# EAGLE board LOGO (EAGLE 7.5.0)

No outline drawn. Coordinates in mm, seen from the top.
Copper layers (1*16): Top 0.035mm / dielectric 1.5mm / Bottom 0.035mm
Design rules "default": minimum track width 10mil, minimum drill 24mil, track to track 8mil, track to pad 8mil, pad to pad 8mil, via to via 8mil, smd to smd 8mil, copper to edge 40mil, drill to drill 8mil, minimum pad ring 10mil, minimum via ring 8mil, stop-mask expansion 4mil, vias tented up to drill 0mil, thermal gap 10mil

## Placement (x,y rotation side)
U$1  [DIOSTUDIO_50]  0,0 0 top
U$2  [DIOSTUDIO_100]  0,2.54 0 top
U$3  [3V3_100]  0,7.62 0 top
U$4  [5V0_100]  7.62,7.62 0 top
U$5  [SCL_100]  0,12.7 0 top
U$6  [SDA_100]  7.62,12.7 0 top
U$7  [GND_100]  0,17.78 0 top
U$8  [PWR_100]  7.62,17.78 0 top
U$9  [INFO]  0,30.48 0 top
U$10  [WEB_100]  7.62,26.67 0 top
U$11  [WEB_100]  7.62,22.86 0 top

## Library data of the parts
U$1-U$11 = Logos